# Altium PCB PCB_pcb-try-1_2025-03-21.pcbdoc
Units mil, origin at the board's own origin, x right, y up, seen from the top; angles counter-clockwise.
Board outline 4805 x 3915 mil, 2 copper layers (Top Layer, Bottom Layer); 19 components, 89 nets, 143 pads, 3 vias.
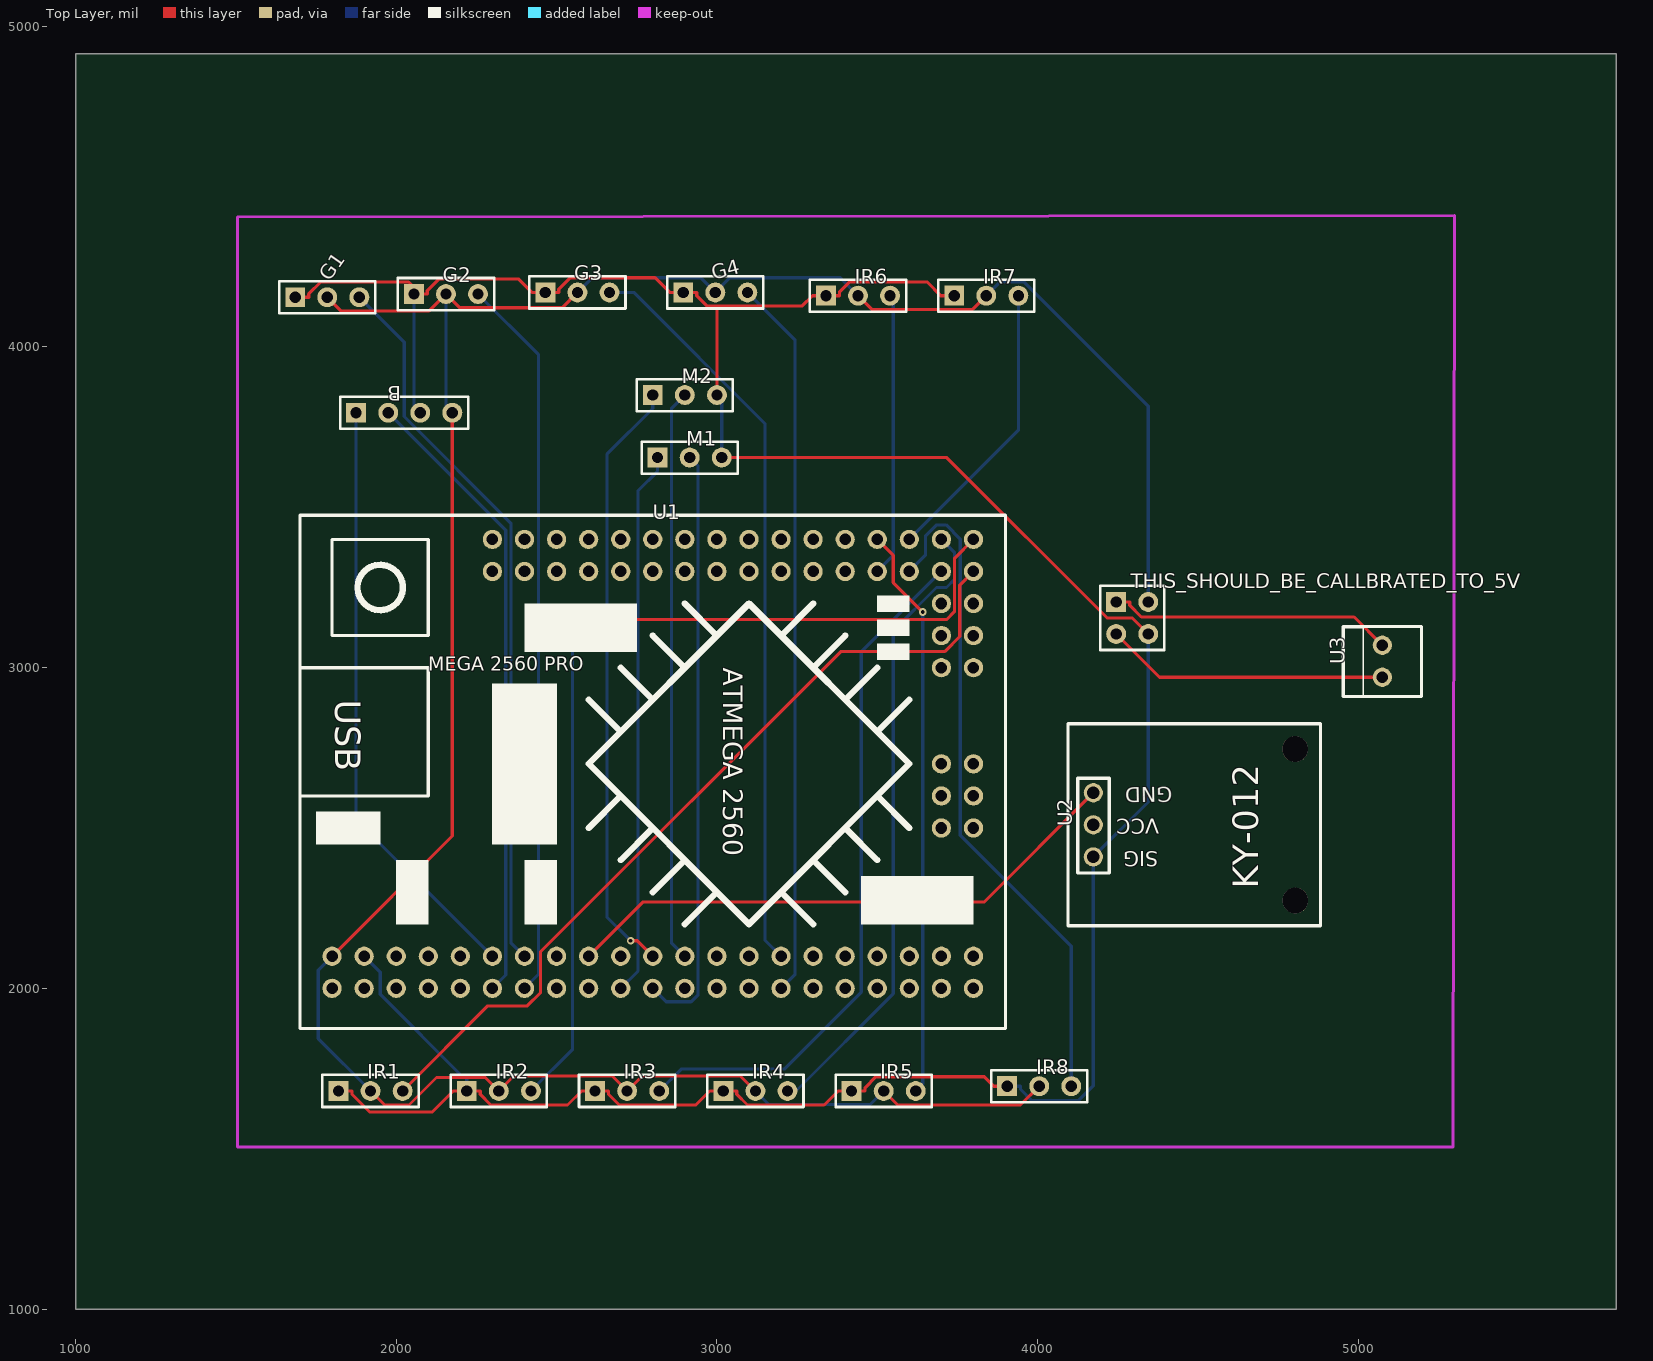
[diagram p0: Top Layer view]
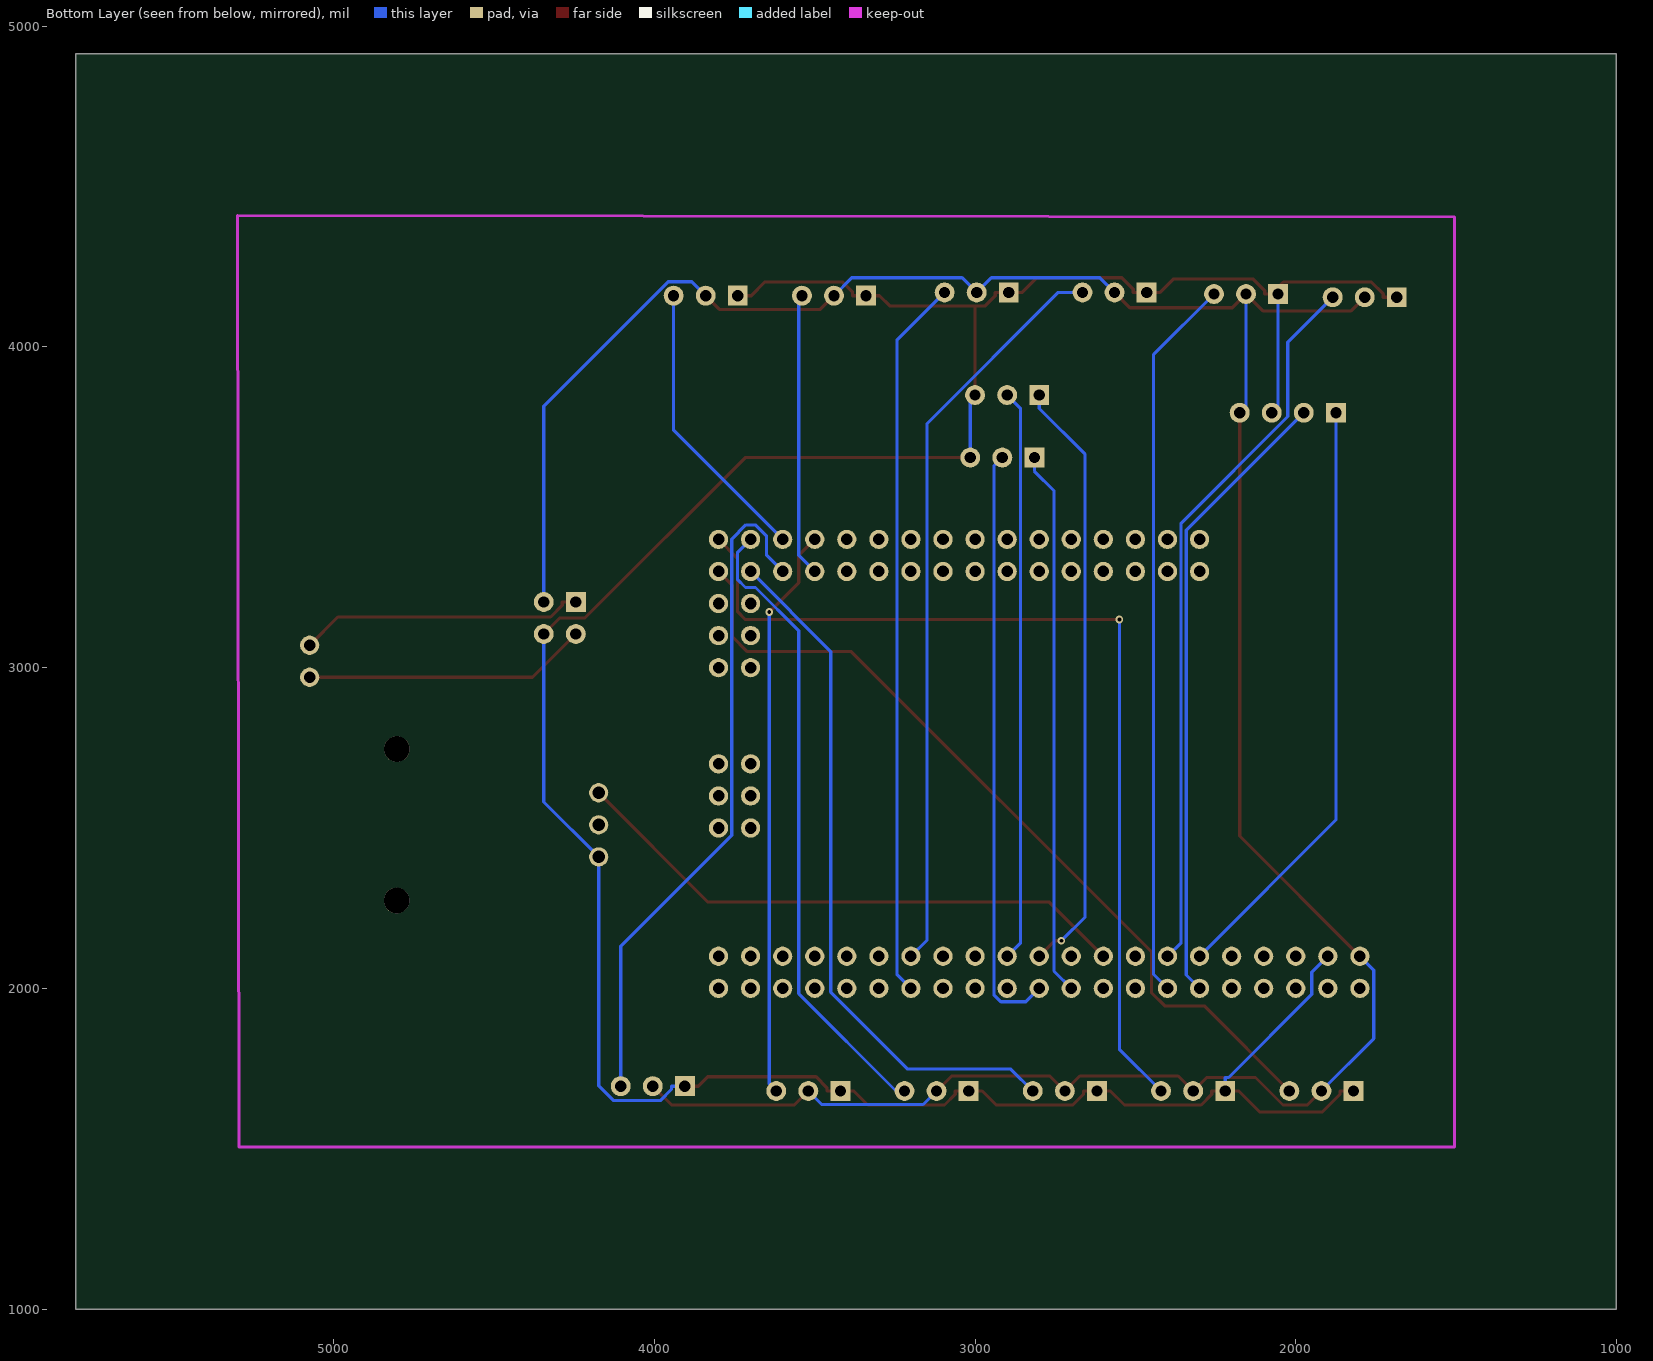
[diagram p1: Bottom Layer view, seen from below]

## Layer stack, top to bottom
Top Layer: signal copper (thickness not stored)
Dielectric: dielectric 12.6, FR-4, Dk 4.8
Bottom Layer: signal copper (thickness not stored)

## Board outline
5805,1000 1000,1000 1000,4915 5805,4915

## Components (designator, comment, footprint, x,y, rotation, side; value= is the part's Value field where it differs from the comment)
B "HDR-M-2.54_1x4" HDR-M-2.54_1X4 2025,3795 r0 top
G1 "HDR-M-2.54_1x3" HDR-M-2.54_1X3 1785,4155 r0 top
G2 "HDR-M-2.54_1x3" HDR-M-2.54_1X3 2155,4165 r0 top
G3 "HDR-M-2.54_1x3" HDR-M-2.54_1X3 2565,4170 r0 top
G4 "HDR-M-2.54_1x3" HDR-M-2.54_1X3 2995,4170 r0 top
IR1 "photoelectric" HDR-M-2.54_1X3 1920,1680 r0 top
IR2 "photoelectric" HDR-M-2.54_1X3 2320,1680 r0 top
IR3 "photoelectric" HDR-M-2.54_1X3 2720,1680 r0 top
IR4 "photoelectric" HDR-M-2.54_1X3 3120,1680 r0 top
IR5 "photoelectric" HDR-M-2.54_1X3 3520,1680 r0 top
IR6 "photoelectric" HDR-M-2.54_1X3 3440,4160 r0 top
IR7 "photoelectric" HDR-M-2.54_1X3 3840,4160 r0 top
IR8 "photoelectric" HDR-M-2.54_1X3 4005,1695 r0 top
M1 "motor driver control" HDR-M-2.54_1X3 2915,3655 r0 top
M2 "motor driver control" HDR-M-2.54_1X3 2900,3850 r0 top
THIS_SHOULD_BE_CALLBRATED_TO_5V "regulator" HDR-M-2.54_2X2 4295,3155 r0 top
U1 "misumo potente" "ARDUINO MEGA 2560 PRO" 2800,2700 r0 top
U2 "KY-012" KY012 4095,2195 r90 top
U3 "power input" "2 PIN FIXED TERMINAL BLOCK" 5075,2970 r90 top

## Footprints (in the part's own frame and the unit in brackets; to place one, negate y for a bottom-side part, rotate by r counter-clockwise, add the part's x,y. Pads: shape width x height; smd on the part's side, far side on the other; paste and mask are expansions set on the pad)
"2 PIN FIXED TERMINAL BLOCK" [mil]
  round 60 hole 36 paste+0 mask+2: 1(0,0) 2(100,0)
  silkscreen extent -60,-122 158,122
"ARDUINO MEGA 2560 PRO" [mil]
  round 60 hole 36 paste+0 mask+4: 1(-500,700) 2(-500,600) 3(-400,700) 4(-400,600) 5(-300,700) 6(-300,600) 7(-200,700) 8(-200,600) 9(-100,700) 10(-100,600) 11(0,700) 12(0,600) 13(100,700) 14(100,600) 15(200,700) 16(200,600) 17(300,700) 18(300,600) 19(400,700) 20(400,600) 21(500,700) 22(500,600) 23(600,700) 24(600,600) 25(700,700) 26(700,600) 27(800,700) 28(800,600) 29(900,700) 30(900,600) 31(1000,700) 32(1000,600) 33(1000,500) 34(900,500) 35(1000,400) 36(900,400) 37(1000,300) 38(900,300) 39(1000,0) 40(900,0) 41(1000,-100) 42(900,-100) 43(1000,-200) 44(900,-200) 45(1000,-700) 46(1000,-600) 47(900,-700) 48(900,-600) 49(800,-700) 50(800,-600) 51(700,-700) 52(700,-600) 53(600,-700) 54(600,-600) 55(500,-700) 56(500,-600) 57(400,-700) 58(400,-600) 59(300,-700) 60(300,-600) 61(200,-700) 62(200,-600) 63(100,-700) 64(100,-600) 65(0,-700) 66(0,-600) 67(-100,-700) 68(-100,-600) 69(-200,-700) 70(-200,-600) 71(-300,-700) 72(-300,-600) 73(-400,-700) 74(-400,-600) 75(-500,-700) 76(-500,-600) 77(-600,-700) 78(-600,-600) 79(-700,-700) 80(-700,-600) 81(-800,-700) 82(-800,-600) 83(-900,-700) 84(-900,-600) 85(-1000,-700) 86(-1000,-600)
  silkscreen extent -1100,-825 1100,775
HDR-M-2.54_1X3 [mil]
  rect 62x62 hole 35 paste+0 mask+2: 1(-100,0)
  round 62 hole 35 paste+0 mask+2: 2(0,0) 3(100,0)
  silkscreen extent -150,-50 150,50
HDR-M-2.54_1X4 [mil]
  rect 62x62 hole 35 paste+0 mask+2: 1(-150,0)
  round 62 hole 35 paste+0 mask+2: 2(-50,0) 3(50,0) 4(150,0)
  silkscreen extent -200,-50 200,50
HDR-M-2.54_2X2 [mil]
  rect 62x62 hole 35 paste+0 mask+2: 1(-50,50)
  round 62 hole 35 paste+0 mask+2: 2(50,50) 3(-50,-50) 4(50,-50)
  silkscreen extent -100,-100 100,100
KY012 [mil]
  round 60 hole 39.37 paste+0 mask+2: 1(414.96,-78.74) 2(314.96,-78.74) 3(214.96,-78.74)
  round 80 hole 80 unplated paste+0: ""(78.74,-708.66) ""(551.18,-708.66)
  silkscreen extent 0,-787 630,0

## Via types
v1: diameter 24, hole 12, Top Layer to Bottom Layer, tented both sides, 3 vias

## Nets (pads, with @x,y where several pads share a name; then routed paths per layer and width w, separated by ;. In a path a pad name is that pad's centre, name@x,y a point inside that pad or via, vN(x,y) a via of type N, cw(c..) or ccw(c..) an arc to the next point about the centre after c; other vN are vias at no path point)
BLUETOOTHRX: B.2 U1.75 | length 1964.1
  Bottom Layer w10: B.2 2341.62,3428.38 2341.62,2041.62 U1.75
BLUETOOTHTX: B.1 U1.76 | length 1871
  Bottom Layer w10: B.1 1875,2525 U1.76
BUZZER: U1.70 U2.1 | length 1785
  Top Layer w10: U1.70 2768.91,2268.91 3832.69,2268.91 U2.1
GND: B.3 G1.1 G2.1 G3.1 G4.1 IR1.1 IR2.1 IR3.1 IR4.1 IR5.1 IR6.1 IR7.1 IR8.1 M1.3 M2.3 THIS_SHOULD_BE_CALLBRATED_TO_5V.4 U1.84 U2.3 | length 9358.8
  Top Layer w10: G1.1 1727.01,4155 1727.01,4165.5 1764.08,4202.57 2038.44,4202.57 G2.1@2076.01,4165 ; IR1.1 1862.01,1680 1862.01,1669.5 1917.04,1614.47 2112.46,1614.47 2177.99,1680 IR2.1 2241.01,1680 2262.01,1680 2262.01,1669.5 2295.32,1636.19 2534.18,1636.19 2577.99,1680 IR3.1 2641.01,1680 2662.01,1680 2662.01,1669.5 2695.32,1636.19 2934.18,1636.19 2977.99,1680 IR4.1 3041.01,1680 3062.01,1680 3062.01,1669.5 3095.32,1636.19 3334.18,1636.19 3377.99,1680 IR5.1 3441.01,1680 3462.01,1680 3462.01,1690.5 3495.68,1724.17 3833.82,1724.17 3862.99,1695 IR8.1 ; G2.1 G2.1@2076.01,4165 ; M2.3 3000,4127.92 ; M1.3 3717.12,3655 4217.16,3154.96 4295.04,3154.96 THIS_SHOULD_BE_CALLBRATED_TO_5V.4 ; IR7.1 3697.99,4160 3655.15,4202.84 3414.35,4202.84 3382.01,4170.5 3382.01,4160 3361.01,4160 IR6.1 3297.99,4160 3265.91,4127.92 3000,4127.92 ; G2.1@2076.01,4165 2097.01,4165 2097.01,4175.5 2133.8,4212.29 2380.7,4212.29 2422.99,4170 G3.1 2486.01,4170 2507.01,4170 2507.01,4180.5 2542.13,4215.62 2807.37,4215.62 2852.99,4170 G4.1 2897.5,4170 2937.01,4170 2937.01,4159.5 2968.59,4127.92 3000,4127.92
  Bottom Layer w10: U1.84 1950,2050 1950,1981.51 2209.5,1722.01 2220,1722.01 IR2.1 ; G2.1 2055,3815 B.3 ; M2.3 3015,3835 M1.3 ; IR8.1 3947.01,1695 3947.01,1684.5 3981.61,1649.9 4127.31,1649.9 4173.74,1696.33 U2.3 4345,2581.22 THIS_SHOULD_BE_CALLBRATED_TO_5V.4
MOTOR1EN: M1.2 U1.65 | length 1853.6
  Bottom Layer w10: U1.65 2841.9,1958.1 2919.46,1958.1 2941.25,1979.89 2941.25,3628.75 M1.2
MOTOR1PWM: M1.1 U1.67 | length 1702.6
  Bottom Layer w10: U1.67 2753.98,2053.98 2753.98,3551.97 2815,3612.99 M1.1
MOTOR2EN: M2.2 U1.64 | length 1784.8
  Bottom Layer w10: U1.64 2857.98,2142.02 2857.98,3807.98 M2.2
MOTOR2PWM: M2.1 U1.66 | length 1880.6
  Top Layer w10: v1(2730.91,2148.48) 2751.52,2148.48 U1.66
  Bottom Layer w10: v1(2730.91,2148.48) 2656.95,2222.44 2656.95,3664.94 2800,3807.99 M2.1
NOR1: G1.3 U1.74 | length 2268.3
  Bottom Layer w10: G1.3 2025,4015 2025,3783.22 2357.7,3450.52 2357.7,2142.3 U1.74
NOR2: G2.3 U1.73 | length 2260.9
  Bottom Layer w10: G2.3 2443.23,3976.77 2443.23,2043.23 U1.73
NOR3: G3.3 U1.58 | length 2335.9
  Bottom Layer w10: G3.3 2740.66,4170 3150,3760.66 3150,2150 U1.58
NOR4: G4.3 U1.57 | length 2249.7
  Bottom Layer w10: G4.3 3243.75,4021.25 3243.75,2043.75 U1.57
PHOTOELECTRICPIN1: IR1.3 U1.32 | length 2619.7
  Top Layer w10: IR1.3 2285.22,1945.22 2408.94,1945.22 2450,1986.28 2450,2114.22 3385.78,3050 3709.94,3050 3757.16,3097.22 3757.16,3257.16 U1.32
PHOTOELECTRICPIN2: IR2.3 U1.31 | length 2974.5
  Top Layer w10: v1(2550,3150) 3715.82,3150 3741.08,3175.26 3741.08,3341.08 U1.31
  Bottom Layer w10: IR2.3 2550,1810 v1(2550,3150)
PHOTOELECTRICPIN3: IR3.3 U1.30 | length 2172.9
  Bottom Layer w10: IR3.3 2888.13,1748.13 3209.73,1748.13 3450,1988.4 3450,3050 U1.30
PHOTOELECTRICPIN4: IR4.3 U1.29 | length 1986.6
  Bottom Layer w10: IR4.3 3246.47,1680 3550,1983.53 3550,3115.32 3684.68,3250 3715.82,3250 3741.08,3275.26 3741.08,3358.92 U1.29
PHOTOELECTRICPIN5: IR8.3 U1.28 | length 2121.5
  Bottom Layer w10: U1.28 3650,3350 3650,3409.62 3685.59,3445.21 3714.48,3445.21 3758.91,3400.78 3758.91,2477.15 4105,2131.06 IR8.3
PHOTOELECTRICPIN6: IR7.3 U1.27 | length 900.8
  Bottom Layer w10: U1.27 3940,3740 IR7.3
PHOTOELECTRICPIN7: IR6.3 U1.26 | length 884.9
  Bottom Layer w10: U1.26 3550,3350 3550,4150 IR6.3
PHOTOELECTRICPIN8: IR5.3 U1.25 | length 1787.7
  Top Layer w10: U1.25 3550,3350 3550,3265.17 v1(3641.76,3173.41)
  Bottom Layer w10: IR5.3 3641.76,1701.76 v1(3641.76,3173.41)
SENSORS+: B.4 G1.2 G2.2 G3.2 G4.2 IR1.2 IR2.2 IR3.2 IR4.2 IR5.2 IR6.2 IR7.2 IR8.2 THIS_SHOULD_BE_CALLBRATED_TO_5V.2 U1.86 | length 8586.2
  Top Layer w10: G1.2 1827.63,4112.37 2102.37,4112.37 G2.2 2197.78,4122.22 2517.22,4122.22 G3.2 ; U1.86 2175,2475 B.4 ; IR1.2 1963.75,1636.25 2039.87,1636.25 2125.7,1722.08 2277.92,1722.08 IR2.2 2366.8,1726.8 2673.2,1726.8 IR3.2 2766.4,1726.4 3073.6,1726.4 IR4.2 ; IR6.2 3482.76,4117.24 3797.24,4117.24 IR7.2 ; IR5.2 3563.81,1636.19 3946.19,1636.19 IR8.2
  Bottom Layer w10: U1.86 1756.8,2056.8 1756.8,1843.2 IR1.2 ; G2.2 2155,3815 B.4 ; G3.2 2610.99,4215.99 2949.01,4215.99 G4.2 3040.62,4215.62 3384.38,4215.62 IR6.2 ; IR4.2 3162.09,1637.91 3477.91,1637.91 IR5.2 ; IR7.2 3883.29,4203.29 3957.04,4203.29 4345,3815.33 THIS_SHOULD_BE_CALLBRATED_TO_5V.2
THIS_SHOULD_BE_CALLBRATED_TO_5V_1: THIS_SHOULD_BE_CALLBRATED_TO_5V.1 U3.2 | length 892.1
  Top Layer w10: THIS_SHOULD_BE_CALLBRATED_TO_5V.1 4287.01,3205 4287.01,3194.5 4323.5,3158.01 4986.99,3158.01 U3.2
THIS_SHOULD_BE_CALLBRATED_TO_5V_3: THIS_SHOULD_BE_CALLBRATED_TO_5V.3 U3.1 | length 885.9
  Top Layer w10: THIS_SHOULD_BE_CALLBRATED_TO_5V.3 4380,2970 U3.1
U1_1: U1.1
U1_2: U1.2
U1_3: U1.3
U1_4: U1.4
U1_5: U1.5
U1_6: U1.6
U1_7: U1.7
U1_8: U1.8
U1_9: U1.9
U1_10: U1.10
U1_11: U1.11
U1_12: U1.12
U1_13: U1.13
U1_14: U1.14
U1_15: U1.15
U1_16: U1.16
U1_17: U1.17
U1_18: U1.18
U1_19: U1.19
U1_20: U1.20
U1_21: U1.21
U1_22: U1.22
U1_23: U1.23
U1_24: U1.24
U1_33: U1.33
U1_34: U1.34
U1_35: U1.35
U1_36: U1.36
U1_37: U1.37
U1_38: U1.38
U1_39: U1.39
U1_40: U1.40
U1_41: U1.41
U1_42: U1.42
U1_43: U1.43
U1_44: U1.44
U1_45: U1.45
U1_46: U1.46
U1_47: U1.47
U1_48: U1.48
U1_49: U1.49
U1_50: U1.50
U1_51: U1.51
U1_52: U1.52
U1_53: U1.53
U1_54: U1.54
U1_55: U1.55
U1_56: U1.56
U1_59: U1.59
U1_60: U1.60
U1_61: U1.61
U1_62: U1.62
U1_63: U1.63
U1_68: U1.68
U1_69: U1.69
U1_71: U1.71
U1_72: U1.72
U1_77: U1.77
U1_78: U1.78
U1_79: U1.79
U1_80: U1.80
U1_81: U1.81
U1_82: U1.82
U1_83: U1.83
U1_85: U1.85
VCC: U2.2
pads on no net: U2.

## Silkscreen, mask and mechanical layers (free items; w line width, h text height)
Document:
  lines w0.1: 3402.49,2957.49 3402.51,2957.51

## Text inside footprints (layer, text, board x,y; h text height)
U1: Top Overlay "USB" at 1810,2900 h80 r270; Top Overlay "ATMEGA 2560" at 3020,3000 h60 r270; Top Overlay "MEGA 2560 PRO" at 2100,2975 h75
U2: Top Overlay "SIG" at 4375.4,2443.1 h80 r180; Top Overlay "VCC" at 4380,2545 h80 r180; Top Overlay "GND" at 4419.6,2645 h80 r181